# EAGLE board BlazeIt (EAGLE 8.2.2)
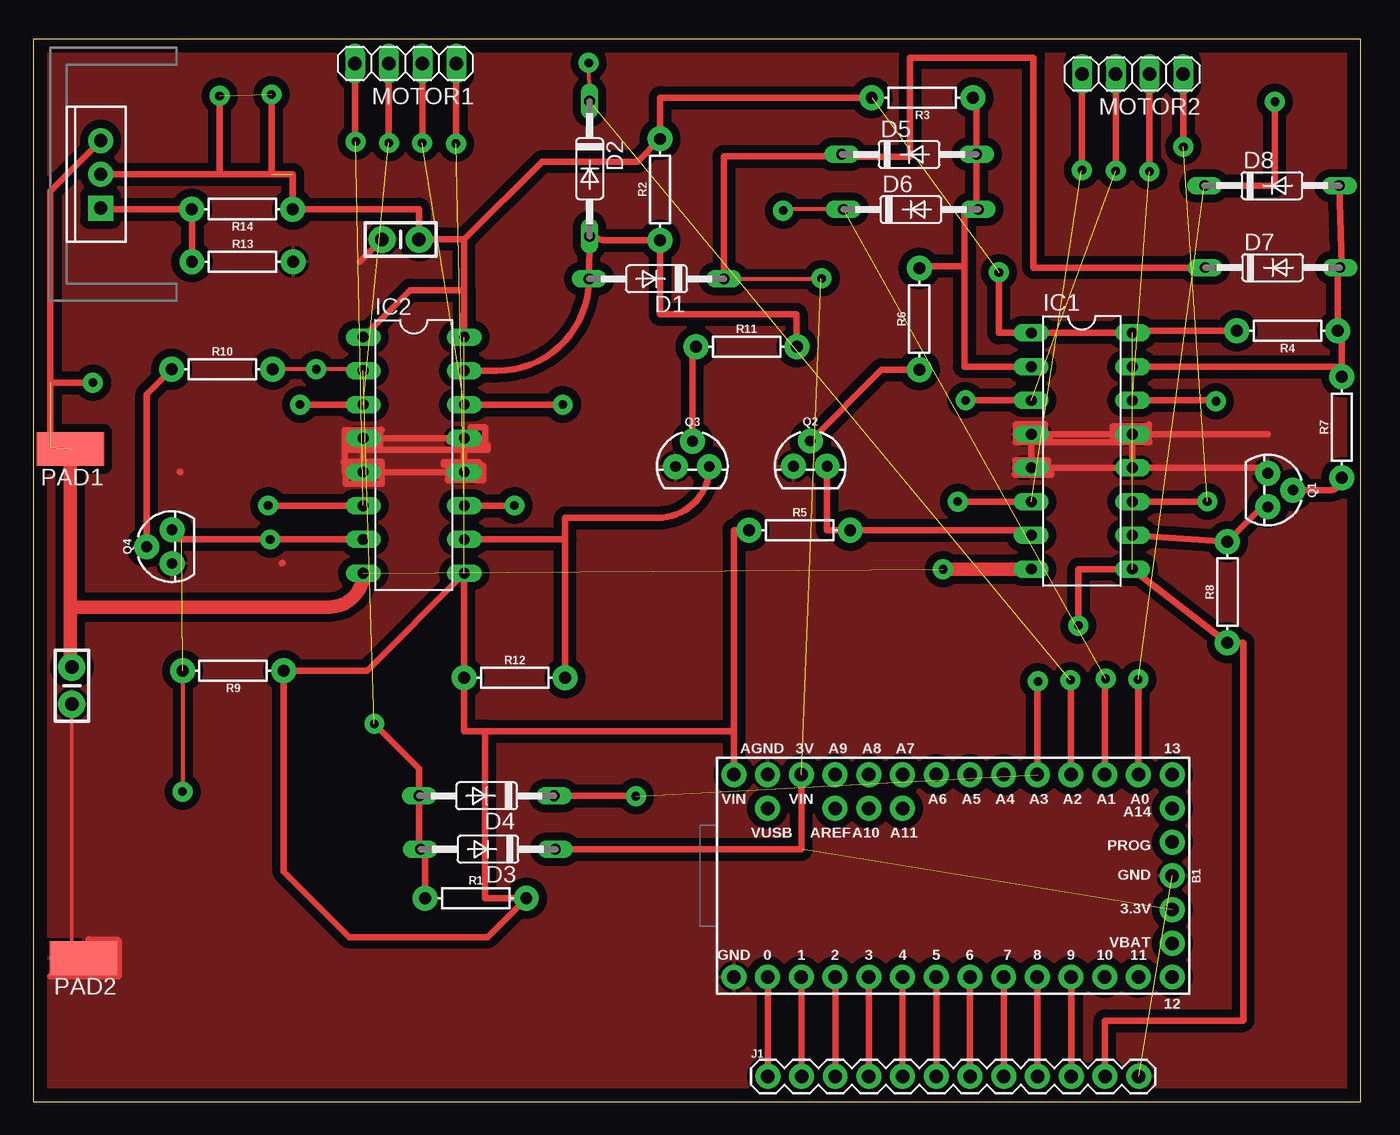
[diagram p0: board, top side]
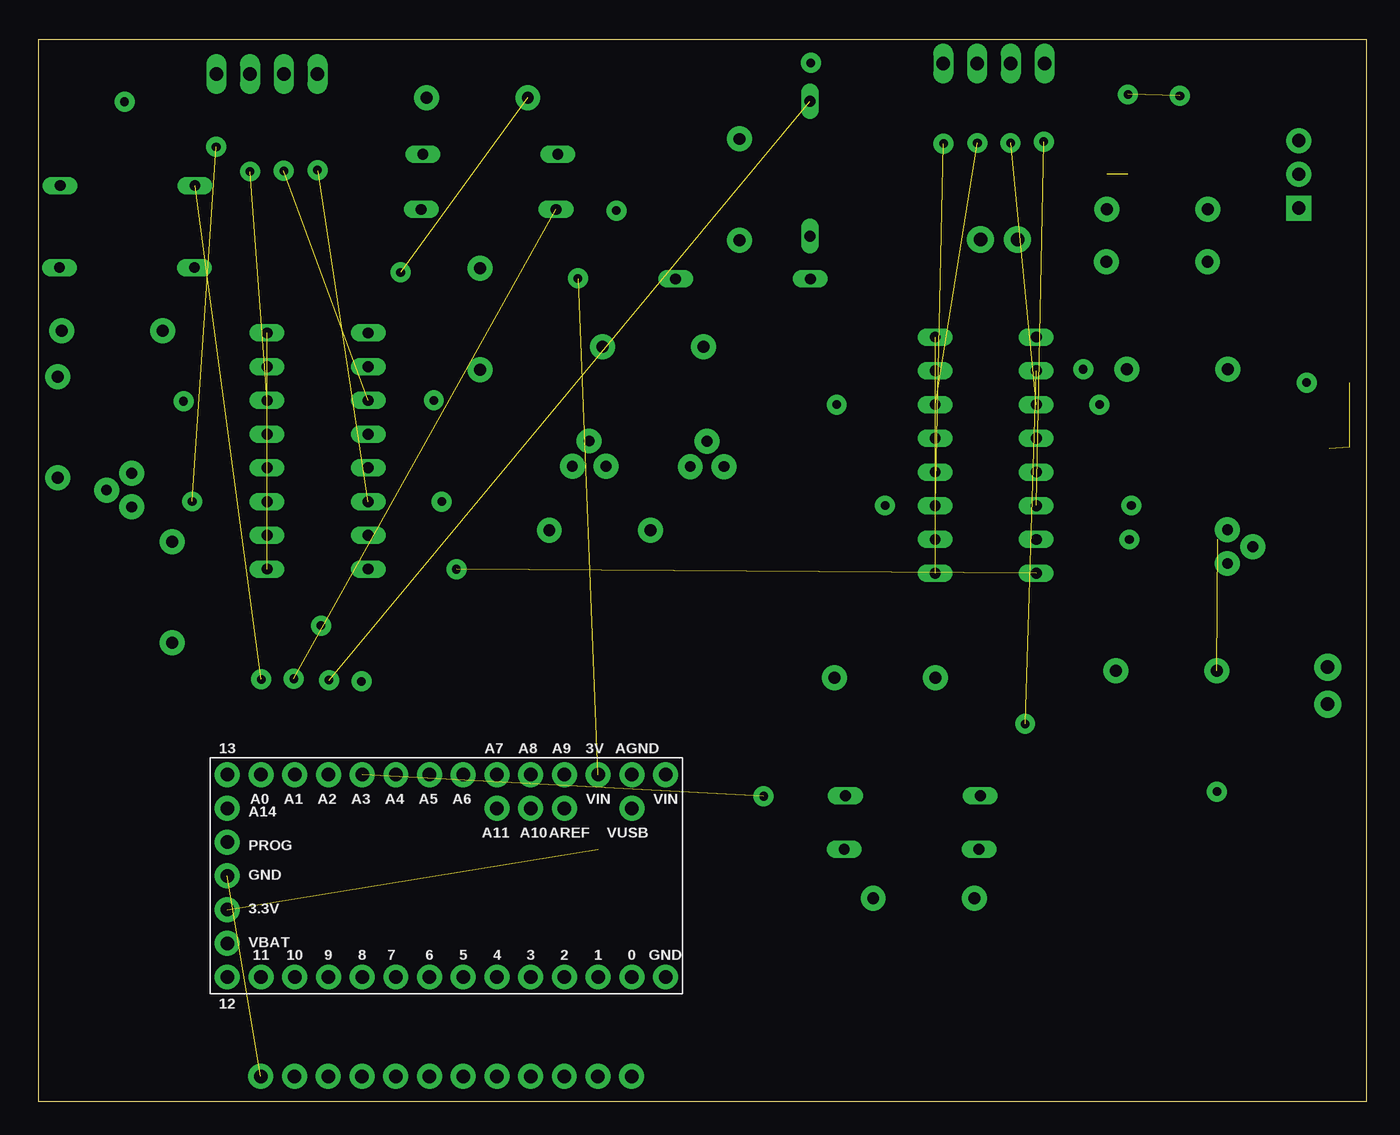
[diagram p1: board, bottom side, seen from below]

Size 100 x 80 mm. Coordinates in mm from the lower left corner, seen from the top.
Outline: 0,0 100,0 100,80 0,80 0,0
Copper layers (1*16): Top 0.035mm / dielectric 1.5mm / Bottom 0.035mm
Design rules "default": minimum track width 6mil, minimum drill 0.35mm, track to track 6mil, track to pad 6mil, pad to pad 6mil, via to via 6mil, smd to smd 6mil, copper to edge 40mil, drill to drill 6mil, minimum pad ring 10mil, minimum via ring 8mil, stop-mask expansion 4mil, vias tented up to drill 0mil, thermal gap 10mil

## Footprints (pad centres in the part's own frame; a part is rotated, then mirrored left to right if it is on the bottom)
TEENSY-3.1 = drill 1.016 pad 1.88: 0 7.62,-13.97; 1 7.62,-11.43; 2 7.62,-8.89; 3 7.62,-6.35; 3.3V 2.54,16.51; 3V -7.62,-11.43; 4 7.62,-3.81; 5 7.62,-1.27; 6 7.62,1.27; 7 7.62,3.81; 8 7.62,6.35; 9 7.62,8.89; 10 7.62,11.43; 11 7.62,13.97; 12 7.62,16.51; 13 -7.62,16.51; 14 -7.62,13.97; 15 -7.62,11.43; 16 -7.62,8.89; 17 -7.62,6.35; 18 -7.62,3.81; 19 -7.62,1.27; 20 -7.62,-1.27; 21 -7.62,-3.81; 22 -7.62,-6.35; 23 -7.62,-8.89; A10 -5.08,-6.35; A11 -5.08,-3.81; A14/DAC -5.08,16.51; AGND -7.62,-13.97; AREF -5.08,-8.89; GND 0,16.51; GND1 7.62,-16.51; PROG -2.54,16.51; VBAT 5.08,16.51; VIN -7.62,-16.51; VUSB -5.08,-13.97
CAP-PTH-SMALL-KIT = drill 1.016 pad 2.032: 1 -1.397,0; 2 1.397,0
DO35-10 = drill 0.813 long: A 5.08,0; C -5.08,0
DIL16 = drill 0.813 long: 1 -8.89,-3.81; 2 -6.35,-3.81; 3 -3.81,-3.81; 4 -1.27,-3.81; 5 1.27,-3.81; 6 3.81,-3.81; 7 6.35,-3.81; 8 8.89,-3.81; 9 8.89,3.81; 10 6.35,3.81; 11 3.81,3.81; 12 1.27,3.81; 13 -1.27,3.81; 14 -3.81,3.81; 15 -6.35,3.81; 16 -8.89,3.81
1X12 = drill 1.016 pad 1.88: 1 0,0; 2 2.54,0; 3 5.08,0; 4 7.62,0; 5 10.16,0; 6 12.7,0; 7 15.24,0; 8 17.78,0; 9 20.32,0; 10 22.86,0; 11 25.4,0; 12 27.94,0
1X04 = drill 1.016 long: 1 -3.81,0; 2 -1.27,0; 3 1.27,0; 4 3.81,0
SMD2,54-5,08 = smd 2.54 x 5.08: 1 0,0
TO-92 = drill 0.813 pad 1.88: 1 -1.27,0; 2 0,1.905; 3 1.27,0
AXIAL-0.3 = drill 0.9 pad 1.88: P$1 -3.81,0; P$2 3.81,0
TO220-ADJ = drill 1 pad 1.88 square: ADJ -2.54,0 | drill 1 pad 1.88: IN 2.54,0; OUT 0,0

## Placement (x,y rotation side)
B1  TEENSY-3.1SILK  [TEENSY-3.1]  69.3,17.01 270 top
C1  0.1uF  [CAP-PTH-SMALL-KIT]  2.92,31.33 270 top
C2  0.1uF  [CAP-PTH-SMALL-KIT]  27.67,64.93 180 top
D1  1N4148DO35-10  [DO35-10]  46.96,61.96 180 top
D2  1N4148DO35-10  [DO35-10]  41.92,70.26 270 top
D3  1N4148DO35-10  [DO35-10]  34.26,19.01 180 top
D4  1N4148DO35-10  [DO35-10]  34.16,23.03 180 top
D5  1N4148DO35-10  [DO35-10]  65.99,71.34 0 top
D6  1N4148DO35-10  [DO35-10]  66.12,67.19 0 top
D7  1N4148DO35-10  [DO35-10]  93.37,62.82 0 top
D8  1N4148DO35-10  [DO35-10]  93.32,68.99 0 top
FRAME1  FRAME-LEDGER  [CREATIVE_COMMONS]  -10,-15 0 top  (outside the outline)
IC1  L293D  [DIL16]  79,49 270 top
IC2  L293D  [DIL16]  28.67,48.69 270 top
J1  [1X12]  55.34,1.9 0 top
MOTOR1  [1X04]  28.05,78.18 180 top
MOTOR2  [1X04]  82.82,77.4 180 top
PAD1  14V  [SMD2,54-5,08]  2.8,49.16 90 top
PAD2  GND PAD  [SMD2,54-5,08]  3.8,10.81 90 top
Q1  200mA/40V  [TO-92]  93,46.06 270 top
Q2  200mA/40V  [TO-92]  58.54,47.85 0 top
Q3  200mA/40V  [TO-92]  49.66,47.83 0 top
Q4  200mA/40V  [TO-92]  10.46,41.8 90 top
R1  10k  [AXIAL-0.3]  33.34,15.33 0 top
R2  10k  [AXIAL-0.3]  47.23,68.69 90 top
R3  10k  [AXIAL-0.3]  66.98,75.61 180 top
R4  10k  [AXIAL-0.3]  94.48,58.05 180 top
R5  10k  [AXIAL-0.3]  57.74,43.04 0 top
R6  1k  [AXIAL-0.3]  66.75,58.94 90 top
R7  1k  [AXIAL-0.3]  98.59,50.79 90 top
R8  10k  [AXIAL-0.3]  89.97,38.37 90 top
R9  10k  [AXIAL-0.3]  15.06,32.46 180 top
R10  1k  [AXIAL-0.3]  14.24,55.16 0 top
R11  1k  [AXIAL-0.3]  53.74,56.86 0 top
R12  10k  [AXIAL-0.3]  36.27,31.92 0 top
R13  1k  [AXIAL-0.3]  15.77,63.26 0 top
R14  330  [AXIAL-0.3]  15.75,67.22 180 top
U3  LM317  [TO220-ADJ]  5.08,69.84 90 top

## Library data of the parts
B1 = SparkFun-Boards; SF_ID: DEV-12646
C1 C2 = SparkFun-Capacitors; PROD_ID: CAP-08370
D1-D8 = diode
FRAME1 = SparkFun-Aesthetics
IC1 IC2 = st-microelectronics; MPN: L293D; OC_FARNELL: 9589619; OC_NEWARK: 56P8249
J1 = SparkFun-Connectors
MOTOR1 MOTOR2 = pinhead
PAD1 PAD2 = wirepad
Q1-Q4 = SparkFun-DiscreteSemi; PROD_ID: TRANS-08447
R1-R5 R8 R9 R12-R14 = SparkFun-Resistors; PROD_ID: RES-12183
R6 R7 R10 R11 = SparkFun-Resistors; PROD_ID: RES-12182
U3 = SparkFun-IC-Power

## Nets
3.3V: B1.3.3V B1.3V D1.C D3.C D5.C D7.C
5V: B1.VIN C2.1 IC1.1 IC1.9 IC1.16 IC2.1 IC2.9 IC2.16 J1.11 R1.P$2 R2.P$2 R3.P$2 R4.P$2 R5.P$1 R8.P$1 R9.P$1 R12.P$1 R14.P$1 U3.OUT
12V: C1.1 IC1.8 IC2.8 PAD1.1 U3.IN
CONTROL1: B1.17 D4.C
CONTROL2: B1.16 D2.C
CONTROL3: B1.15 D6.C
CONTROL4: B1.14 D8.C
GND: B1.AGND B1.GND B1.GND1 C1.2 C2.2 IC1.4 IC1.5 IC1.12 IC1.13 IC2.4 IC2.5 IC2.12 IC2.13 J1.12 PAD2.1 Q1.1 Q2.1 Q3.1 Q4.1 R13.P$2
MOTOR1: D3.A D4.A IC2.2 R1.P$1 R10.P$2
MOTOR2: D1.A D2.A IC2.15 R2.P$1 R11.P$2
MOTOR3: D5.A D6.A IC1.2 R3.P$1 R6.P$2
MOTOR4: D7.A D8.A IC1.15 R4.P$1 R7.P$2
N$1: IC2.3 MOTOR1.3
N$2: IC1.3 MOTOR2.3
N$3: IC2.11 MOTOR1.1
N$4: IC1.6 MOTOR2.4
N$5: IC1.11 MOTOR2.1
N$6: R13.P$1 R14.P$2 U3.ADJ
N$10: Q2.2 R6.P$1
N$15: IC1.7 Q2.3 R5.P$2
N$16: IC1.14 MOTOR2.2
N$17: IC1.10 Q1.3 R8.P$2
N$20: Q1.2 R7.P$1
N$22: Q4.2 R10.P$1
N$23: IC2.7 Q4.3 R9.P$2
N$26: IC2.6 MOTOR1.4
N$27: IC2.14 MOTOR1.2
N$28: IC2.10 Q3.3 R12.P$2
N$30: Q3.2 R11.P$1
SENSOR1: B1.0 J1.1
SENSOR2: B1.1 J1.2
SENSOR3: B1.2 J1.3
SENSOR4: B1.3 J1.4
SENSOR5: B1.4 J1.5
SENSOR6: B1.5 J1.6
SWITCHES1: B1.6 J1.7
SWITCHES2: B1.7 J1.8
SWITCHES3: B1.8 J1.9
SWITCHES4: B1.9 J1.10
VBAT: B1.VBAT
VUSB: B1.VUSB

## Tracks (layer width: path | path; a pad name or v marks a point on that pad's centre or on a via)
3.3V  (via drill 0.65 pad 1.5)  (2 unrouted)
  Top 0.305: D1.C 59.36,61.96 arc90 v59.4,62
  Top 0.508: D7.C 75.35,62.82 75.35,78.6 66.05,78.6 66.05,71.15 60.91,71.15 60.91,71.2 | 60.91,71.2 D5.C | D1.C 52.04,71.2 60.91,71.2 | D3.C 57.87,19.01 B1.3V
5V  (via drill 0.65 pad 1.5)  (5 unrouted)
  Top 0.508: U3.OUT 19.56,69.84 R14.P$1 29.07,67.22 C2.1 32.48,64.93 | R4.P$2 82.97,58.05 IC1.16 IC1.1 72.75,57.89 v72.75,62.45 | 32.48,61.11 32.48,64.93 | 32.48,61.11 IC2.16 | IC2.1 28.39,61.11 32.48,61.11 | R3.P$2 47.23,75.61 R2.P$2 45.53,70.8 38.35,70.8 32.48,64.93 | 34.05,27.9 34.05,15.33 R1.P$2 34.22,12.4 23.8,12.4 18.87,17.33 R9.P$1 25.14,32.46 IC2.9 R12.P$1 32.46,27.9 34.05,27.9 | 34.05,27.9 52.79,27.9 | 52.79,27.9 B1.VIN | R5.P$1 52.79,43.04 52.79,27.9 | J1.11 80.74,6.1 91.15,6.1 91.15,34.56 R8.P$1 IC1.9 78.75,40.11 v78.75,35.85 | 14.05,69.84 v14.05,75.75 | 17.95,69.84 v17.95,75.85
12V  (via drill 0.65 pad 1.5)  (3 unrouted)
  Top 0.254: C1.1 2.8,32.73
  Top 0.508: U3.IN 1.27,68.57 1.27,49.3 | 2.92,49.16 PAD1.1 | 1.27,54.15 v4.5,54.15
  Top 1.016: PAD1.1 2.8,37.25 | 2.8,37.25 2.8,32.85 arc90 C1.1 | 2.8,37.25 22.31,37.25 arc90 IC2.8 | IC1.8 v68.55,40.11 v68.55,40.1
CONTROL1  (via drill 0.65 pad 1.5)  (1 unrouted)
  Top 0.508: B1.17 75.65,31.6 v75.7,31.65 | D4.C 45.4,23.03 v45.4,23
CONTROL2  (via drill 0.65 pad 1.5)  (1 unrouted)
  Top 0.305: D2.C 41.87,78.58 arc90 41.85,78.6 v41.85,78.23
  Top 0.508: B1.16 78.19,31.71 v78.15,31.75
CONTROL3  (via drill 0.65 pad 1.5)  (1 unrouted)
  Top 0.305: D6.C 56.59,67.19 arc90 v56.5,67.1
  Top 0.508: B1.15 80.73,31.78 v80.8,31.85
CONTROL4  (via drill 0.65 pad 1.5)  (1 unrouted)
  Top 0.508: D8.C 93.55,68.99 v93.55,75.3 | B1.14 83.27,31.78 v83.25,31.8
GND  (1 unrouted)
  Top 0.254: C1.2 2.92,11.69 PAD2.1
  Top 0.508: IC2.5 IC2.12 | 31.31,49.96 IC2.4 IC2.5 | 31.31,49.96 IC2.13 IC2.12 | 18.73,40.53 18.8,40.6 | 24.6,63.26 C2.2 | IC1.12 76.43,47.73 | 76.23,50.27 IC1.13 | IC1.13 IC1.12 | Q1.1 93,47.73 IC1.12 | 32.89,47.83 arc90 IC2.12 | IC1.13 93,50.27 | 11.08,47.42 arc-90 11.05,47.45 | PAD2.1 4.2,11.21 4.2,12.25 4.25,12.2 6.35,12.2 6.45,12.1 6.45,9.45 1.3,9.45 | IC2.5 23.45,47.42 23.45,48.3 23.55,48.3 23.55,46.55 26.25,46.55 26.25,48.2 23.4,48.2 23.4,48.15 23.45,48.15 23.45,50.55 26.25,50.55 26.25,50.6 26.15,50.6 26.15,49.25 23.55,49.25 23.55,49.1 34.25,49.1 34.25,49.45 32.95,49.45 32.95,50.8 34.05,50.8 34.05,49.75 31.31,49.75 31.31,49.96 | IC2.12 33.6,47.42 33.6,48.15 30.9,48.15 30.9,47.95 31.25,47.95 31.25,46.8 33.9,46.8 33.9,47.9 | 76.23,50.27 IC1.4 IC1.5 76.43,47.73 | 76.23,50.27 76.6,50.27 76.6,49.65 | 76.6,49.65 74.05,49.65 74.05,51 76.23,51 76.23,50.27 | 76.6,49.65 84.1,49.65 | 76.6,49.65 84.05,49.65 84.05,50.84 | 84.05,50.84 84.05,51 | 76.6,49.65 81.35,49.65 81.35,50.85 84.05,50.85 84.05,50.84 | 76.43,47.73 76.7,47.73 76.7,47.2 73.95,47.2 73.95,47.25 74,47.25 74,48.3 76.43,48.3 76.43,47.73
  pour Top (isolate 0.61): 0.05,79.95 100,79.95 100,0.05 0.05,0.05
MOTOR1  (via drill 0.65 pad 1.5)  (1 unrouted)
  Top 0.305: IC2.2 24.74,55.16 v21.33,55.16 R10.P$2
  Top 0.508: R1.P$1 29.53,19.01 D3.A 29.08,19.01 D4.A 29.08,25.07 v25.7,28.45
MOTOR2
  Top 0.508: D1.A D2.A 42.92,64.88 R2.P$1 47.23,59.3 57.5,59.3 57.5,56.86 R11.P$2 | D1.A | IC2.15 34.95,55.04 arc90 D1.A
MOTOR3
  Top 0.508: IC1.2 70.15,55.35 70.15,62.13 | 70.15,62.13 70.15,62.9 66.75,62.9 R6.P$2 | 70.15,62.13 70.15,67.19 D6.A 71.07,67.19 D5.A 71.07,75.61 R3.P$1
MOTOR4
  Top 0.508: D8.A 98.6,62.97 D7.A 98.29,62.66 R4.P$1 98.59,57.75 R7.P$2 98.59,55.35 IC1.15
N$1  (via drill 0.65 pad 1.5)  (1 unrouted)
  Top 0.305: 20.4,52.5 arc90 20.2,52.3 20.2,52.4 arc90 v20.1,52.5 | v26.8,72.2 arc-90 26.78,72.22
  Top 0.508: MOTOR1.3 26.78,72.22 arc90 v26.8,72.2 | IC2.3 v20.1,52.5
N$2  (via drill 0.65 pad 1.5)  (1 unrouted)
  Top 0.508: IC1.3 v70.25,52.81 | MOTOR2.3 v81.55,70.1
N$3  (via drill 0.65 pad 1.5)  (1 unrouted)
  Top 0.305: v36.25,44.9 36.25,44.88 | v31.85,72.15 arc90 v31.86,72.16
  Top 0.508: 32.48,44.95 IC2.11 36.25,44.88 v36.25,44.9 | MOTOR1.1 v31.86,72.16 arc-90 v31.85,72.15
N$4  (via drill 0.65 pad 1.5)  (1 unrouted)
  Top 0.305: v79.01,70.16 arc-90 78.95,70.1
  Top 0.508: IC1.6 v69.65,45.19 v69.65,45.2 | MOTOR2.4 v79.01,70.16
N$5  (via drill 0.65 pad 1.5)  (1 unrouted)
  Top 0.508: IC1.11 v88.45,45.19 v88.45,45.2 | MOTOR2.1 86.63,71.92 v86.65,71.9
N$6
  Top 0.254: 11.86,67.3 R14.P$2 11.96,67.2
  Top 0.508: U3.ADJ 5.18,67.2 11.96,67.2 | R14.P$2 11.96,67.2 R13.P$1
N$10
  Top 0.508: Q2.2 63.91,55.13 R6.P$1
N$15
  Top 0.508: IC1.7 74.8,43.04 R5.P$2 59.81,43.04 Q2.3
N$16  (via drill 0.65 pad 1.5)  (1 unrouted)
  Top 0.305: v84.09,70.06 arc90 v84.1,70.05
  Top 0.508: MOTOR2.2 v84.09,70.06 | IC1.14 89.1,52.81 v89.1,52.75
N$17
  Top 0.508: Q1.3 92.58,44.79 R8.P$2 IC1.10
N$20
  Top 0.508: Q1.2 97.67,46.06 arc90 R7.P$1
N$22
  Top 0.508: Q4.2 8.55,53.28 R10.P$1
N$23  (via drill 0.65 pad 1.5)  (1 unrouted)
  Top 0.305: R9.P$2 v11.25,23.35
  Top 0.508: Q4.3 arc90 11.19,42.34 v17.85,42.34 IC2.7
N$26  (via drill 0.65 pad 1.5)  (1 unrouted)
  Top 0.305: 24.84,44.9 IC2.6 | v24.3,72.3 arc-90 24.24,72.36
  Top 0.508: MOTOR1.4 24.24,72.36 arc90 v24.3,72.3 | IC2.6 17.7,44.88 v17.7,44.9
N$27  (via drill 0.65 pad 1.5)  (1 unrouted)
  Top 0.305: v29.3,72.2 arc90 29.32,72.22
  Top 0.508: MOTOR1.2 29.32,72.22 arc-90 v29.3,72.2 | IC2.14 v39.9,52.5
N$28
  Top 0.508: R12.P$2 40.08,42.34 | 40.08,42.34 IC2.10 | 40.08,42.34 40.08,43.97 47.07,43.97 arc90 Q3.3
N$30
  Top 0.508: Q3.2 49.66,56.59 arc-90 R11.P$1
SENSOR1
  Top 0.508: B1.0 J1.1
SENSOR2
  Top 0.508: B1.1 J1.2
SENSOR3
  Top 0.508: B1.2 J1.3
SENSOR4
  Top 0.508: B1.3 J1.4
SENSOR5
  Top 0.508: B1.4 J1.5
SENSOR6
  Top 0.508: B1.5 J1.6
SWITCHES1
  Top 0.508: B1.6 J1.7
SWITCHES2
  Top 0.508: B1.7 J1.8
SWITCHES3
  Top 0.508: B1.8 J1.9
SWITCHES4
  Top 0.508: B1.9 J1.10